# Altium PCB PCB_isdestymas.PcbDoc
Units mil, origin at the board's own origin, x right, y up, seen from the top; angles counter-clockwise.
Board outline 6000 x 4000 mil, 2 copper layers (Top Layer, Bottom Layer); 35 components, 32 nets, 205 pads, 0 vias.
Unrouted connection lines stored in the file: 90.
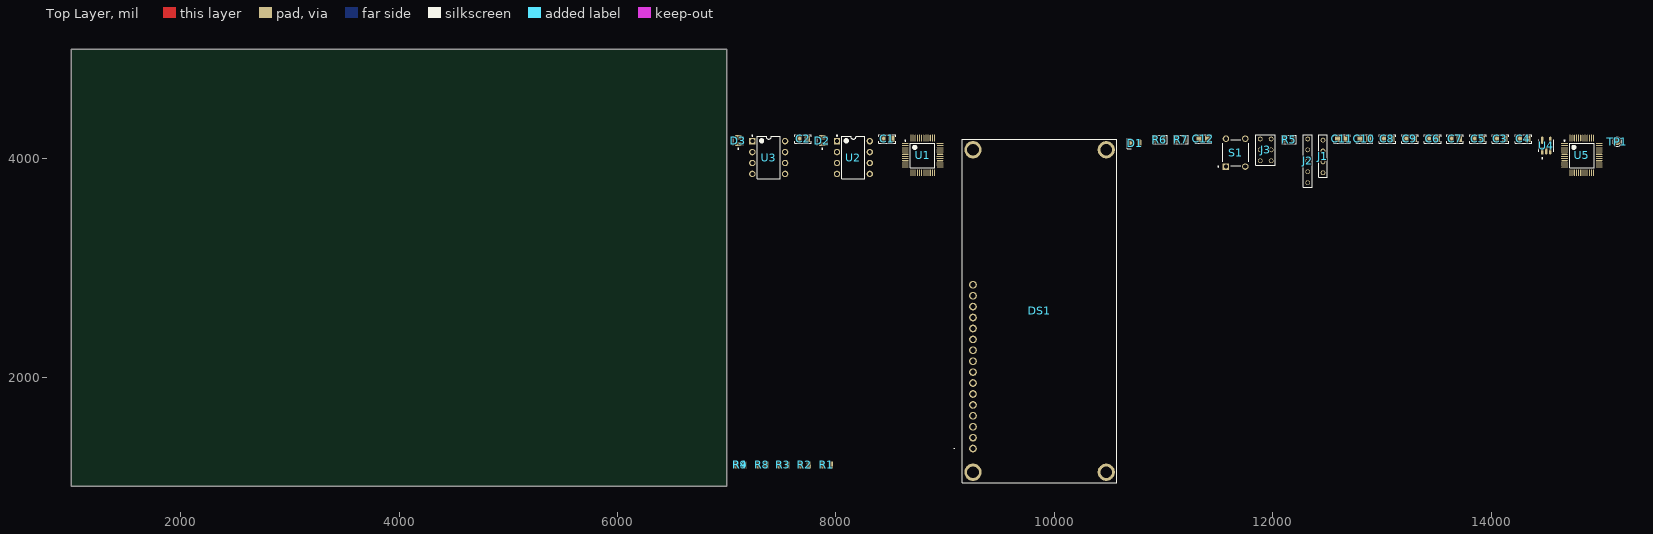
[diagram p0: Top Layer view]
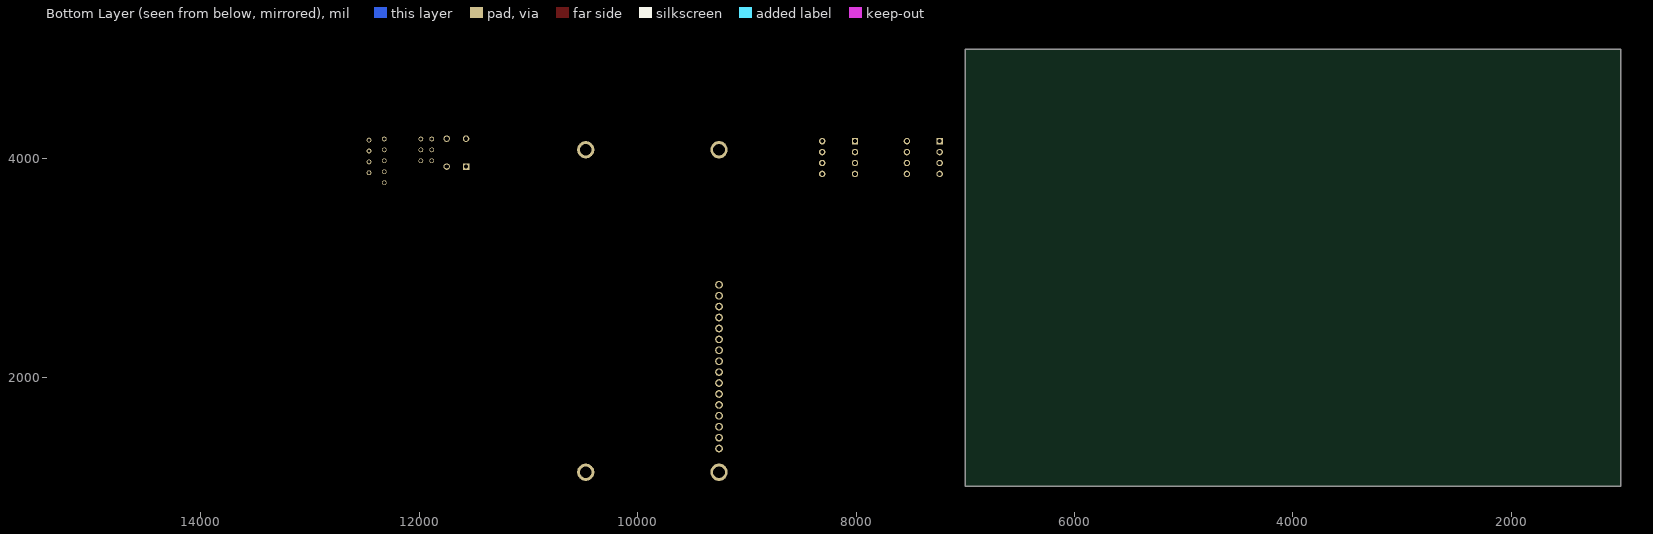
[diagram p1: Bottom Layer view, seen from below]

## Layer stack, top to bottom
Top Solder: solder mask 0.4, Solder Resist, Dk 3.5
Top Layer: signal copper 1.4
Dielectric 1: dielectric 12.6, FR-4, Dk 4.8
Bottom Layer: signal copper 1.4
Bottom Solder: solder mask 0.4, Solder Resist, Dk 3.5

## Board outline
1000,1000 7000,1000 7000,5000 1000,5000

## Design rules (kind name [scope] priority, off if disabled: settings)
Clearance [All] p1: gap=10 ignorepadtopadclearanceinfootprint=FALSE
PolygonConnect [All] p1: connectstyle=Relief reliefconductorwidth=10 reliefentries=4 polygonreliefangle="90 Angle" airgapwidth=10
RoutingVias [All] p1: holewidth=28 width=50 viastyle="Through Hole" minholewidth=28 minwidth=50 maxholewidth=28 maxwidth=50
SolderMaskExpansion [All] p1: expansion=4 istentingtop=FALSE
SupplyNets "Schematic Supply Nets_2" [InNet('CTRST')] p1: voltage=0.000
SupplyNets "Schematic Supply Nets_1" [InNet('3.3V')] p2: voltage=0.000
SupplyNets "Schematic Supply Nets" [InNet('5V_USB')] p3: voltage=0.000
Width [All] p1: maxlimit=10 minlimit=10 preferedwidth=10
30 further rules are at their usual default settings.

## Classes and differential pairs
net class D[0..7]: D0 D1 D2 D3 D4 D5 D6 D7

## Components (designator, comment, footprint, x,y, rotation, side; value= is the part's Value field where it differs from the comment)
C1 "560p" "CAP 0805_2012" 8470,4180 r0 top value=560pF
C2 "560p" "CAP 0805_2012" 7700,4180 r0 top value=560pF
C3 "1u" "CAP 0805_2012" 14085,4180 r0 top value=1uF
C4 "1u" "CAP 0805_2012" 14295,4180 r0 top value=1uF
C5 "100n" "CAP 0805_2012" 13880,4180 r0 top value=100nF
C6 "10u" "CAP 0805_2012" 13465,4180 r0 top value=10uF
C7 "100n" "CAP 0805_2012" 13670,4180 r0 top value=100nF
C8 "10u" "CAP 0805_2012" 13050,4180 r0 top value=10uF
C9 "100n" "CAP 0805_2012" 13255,4180 r0 top value=100nF
C10 "10u" "CAP 0805_2012" 12840,4180 r0 top value=10uF
C11 "100n" "CAP 0805_2012" 12635,4180 r0 top value=100nF
C12 "100n" "CAP 0805_2012" 11365,4180 r0 top value=100nF
D1 "GREEN" LED_0805_GREEN 10740,4140 r0 top
D2 "TEMD6200FX01" FP-6_541-5064_01-4-MFG 7875,4165 r90 top
D3 "TEMD6200FX01" FP-6_541-5064_01-4-MFG 7105,4165 r90 top
DS1 "162C-BA-BC" 162CBABC 9255,1345 r90 top
J1 "dupont header 4x1 2.54mm pitch" "DUPONT 4X1" 12460,3870 r90 top
J2 "dupont header 5x1 2.54mm pitch" "DUPONT 5X1" 12320,3780 r90 top
J3 "dupont header 3x2 2.54mm pitch" "DUPONT 3X2" 11885,3980 r90 top
R1 "820k" RES_0805#1 7915,1195 r0 top value=820kR
R2 "10k" RES_0805#1 7715,1195 r0 top value=10kR
R3 "330" RES_0805#1 7520,1195 r0 top value=330R
R4 "820k" RES_0805#1 7125,1195 r0 top value=820kR
R5 "1k" RES_0805#2 12150,4175 r0 top value=1kR
R6 "20k" RES_0805#2 10965,4175 r0 top value=20kR
R7 "20k" RES_0805#2 11160,4175 r0 top value=20kR
R8 "10k" RES_0805#1 7325,1195 r0 top value=10kR
R9 "330" RES_0805#1 7125,1195 r0 top value=330R
S1 "TS02-66-60-BK-260-LCR-D" "TACTILE_SWITCH 6X6X6MM" 11660,4055 r90 top
TP1 "3.3V" TP_OVAL 15155,4155 r0 top
U1 "STM32F103C8T6" STM-LQFP48_L 8795,4030 r0 top
U2 "MCP6002-E/P" PDIP300-P8 8160,4010 r0 top
U3 "MCP6002-E/P" PDIP300-P8 7385,4010 r0 top
U4 "AP2112K-3.3TRG1" FP-SOT25-IPC_A 14505,4120 r90 top
U5 "STM32F103C8T6" STM-LQFP48_L 14830,4030 r0 top

## Footprints (in the part's own frame and the unit in brackets; to place one, negate y for a bottom-side part, rotate by r counter-clockwise, add the part's x,y. Pads: shape width x height; smd on the part's side, far side on the other; paste and mask are expansions set on the pad)
162CBABC [mm]
  round 1.8 hole 1.2: 1(0,0) 2(2.54,0) 3(5.08,0) 4(7.62,0) 5(10.16,0) 6(12.7,0) 7(15.24,0) 8(17.78,0) 9(20.32,0) 10(22.86,0) 11(25.4,0) 12(27.94,0) 13(30.48,0) 14(33.02,0) 15(35.56,0) 16(38.1,0)
  round 4.05 hole 2.7: MH1(-5.5,0) MH2(-5.5,-31) MH3(69.5,-31) MH4(69.5,0)
  silkscreen extent -8,-33.5 72,4.4, body extent -7.96,-33.72 72.04,2.28, height 10.39
"CAP 0805_2012" [mm] "Chip Capacitor, 2-Leads, Body 2.00x1.20mm, IPC Medium Density"
  rect 1.3x1.4 smd: 1(-1,0) 2(1,0)
  silkscreen extent -1.92,-1.02 1.92,1.02, body extent -1,-0.64 1,0.64, height 1.26
"DUPONT 3X2" [mm] "Dupont_header 4x1 2.54mm pitch"
  round 1.1 hole 0.8: 1(0,0) 2(2.54,0) 3(5.08,0) 4(0,-2.54) 5(2.54,-2.54) 6(5.08,-2.54)
  silkscreen extent -1.02,-3.56 6.1,1.02
"DUPONT 4X1" [mm] "Dupont_header 4x1 2.54mm pitch"
  round 1.1 hole 0.8: 1(0,0) 2(2.54,0) 3(5.08,0) 4(7.62,0)
  silkscreen extent -1.02,-1.02 8.89,1.02
"DUPONT 5X1" [mm] "Dupont_header 5x1 2.54mm pitch"
  round 1.1 hole 0.8: 1(0,0) 2(2.54,0) 3(5.08,0) 4(7.62,0) 5(10.16,0)
  silkscreen extent -1.02,-1.02 11.18,1.02
FP-6_541-5064_01-4-MFG [mm]
  rect 1x1.45 smd paste+0 mask+0: 1(-0.8,0) 2(0.8,0)
  silkscreen extent -2,-1.16 1.05,1.17, body extent -1.4,-0.82 1.4,0.82, height 0.25
FP-SOT25-IPC_A [mm]
  rect 1.707x0.616 smd paste+0 mask+0: 1(-1.201,0.95)
  rrect100% 1.707x0.616 smd paste+0 mask+0: 2(-1.201,0) 3(-1.201,-0.95) 4(1.201,-0.95) 5(1.201,0.95)
  silkscreen extent -3.08,-1.75 1.4,1.75, body extent -2.55,-2 2.55,2, height 0.25
LED_0805_GREEN [mm]
  rrect25% 1x1.7 smd: A(0.95,0) K(-0.95,0)
  silkscreen extent -1.8,-1.2 -0.9,1.2, body extent -1,-0.63 1,0.63, height 1.12
PDIP300-P8 [mm] "8-Pin Plastic Dual In-Line Package (PDIP)"
  rect 1.5x1.5 hole 0.9: 1(-3.81,3.81)
  round 1.5 hole 0.9: 2(-3.81,1.27) 3(-3.81,-1.27) 4(-3.81,-3.81) 5(3.81,-3.81) 6(3.81,-1.27) 7(3.81,1.27) 8(3.81,3.81)
  silkscreen extent -3.93,-4.9 2.65,5.23, body extent -3.55,-4.9 3.55,4.9, height 4.32
RES_0805#1 [mm]
  rrect25% 1x1.7 smd: 1(-0.95,0) 2(0.95,0)
  body extent -1,-0.63 1,0.63, height 0.47
RES_0805#2 [mm]
  rect 0.7x1.3 smd: 1(-0.95,0) 2(0.95,0)
  silkscreen extent -1.68,-1.02 1.7,1.02, body extent -1,-0.61 1,0.64, height 0.6
STM-LQFP48_L [mm] "QFP, 48-Leads, Body 7x7mm, Pitch 0.5mm, IPC High Density"
  oval 1.55x0.25 smd: 1(-4.025,2.75) 2(-4.025,2.25) 3(-4.025,1.75) 4(-4.025,1.25) 5(-4.025,0.75) 6(-4.025,0.25) 7(-4.025,-0.25) 8(-4.025,-0.75) 9(-4.025,-1.25) 10(-4.025,-1.75) 11(-4.025,-2.25) 12(-4.025,-2.75) 25(4.025,-2.75) 26(4.025,-2.25) 27(4.025,-1.75) 28(4.025,-1.25) 29(4.025,-0.75) 30(4.025,-0.25) 31(4.025,0.25) 32(4.025,0.75) 33(4.025,1.25) 34(4.025,1.75) 35(4.025,2.25) 36(4.025,2.75)
  oval 0.25x1.55 smd: 13(-2.75,-4.025) 14(-2.25,-4.025) 15(-1.75,-4.025) 16(-1.25,-4.025) 17(-0.75,-4.025) 18(-0.25,-4.025) 19(0.25,-4.025) 20(0.75,-4.025) 21(1.25,-4.025) 22(1.75,-4.025) 23(2.25,-4.025) 24(2.75,-4.025) 37(2.75,4.025) 38(2.25,4.025) 39(1.75,4.025) 40(1.25,4.025) 41(0.75,4.025) 42(0.25,4.025) 43(-0.25,4.025) 44(-0.75,4.025) 45(-1.25,4.025) 46(-1.75,4.025) 47(-2.25,4.025) 48(-2.75,4.025)
  silkscreen extent -4.15,-2.85 2.85,3.55, body extent -3.5,-3.5 3.5,3.5, height 1.6
"TACTILE_SWITCH 6X6X6MM" [mm]
  rect 1.508x1.508 hole 1: 1(-3.25,2.25)
  round 1.508 hole 1: 1(3.25,2.25) 2(-3.25,-2.25) 2(3.25,-2.25)
  silkscreen extent -3.35,-3 3,4.1, body extent -3.95,-3 3.95,3, height 6
TP_OVAL [mil]
  round 60 smd: 1(0,0)
  silkscreen extent -42,-42 42,42

## Part data
C1: library part Capacitor, "Ceramic Capacitor, Multilayer, Ceramic, 50V, 5% +Tol, 5% -Tol, C0G, -/+30ppm/Cel TC, 0.00056uF, Surface Mount, 0805", Capacitor Type=Ceramic, Case/Package=0603, Manufacturer=KEMET, Manufacturer Part Number=C0603C561J5GACTU, Manufacturer Series=C0805C561J5GACTU, Max Operating Temperature=125°C, Min Operating Temperature=-55°C, Package Shape=Rectangular, Package Style=SMTMeter, Supplier Part Number=80-C0603C561J5G, Temperature Characteristics Code=C0G, Tolerance  (fill in as +-)=5%, Category="Ceramic Capacitors", ComponentLink1Description=https://datasheet.ciiva.com:443/pdfs/VipMasterIC/IC/KEME/KEME-S-A0005605168/KEME-S-A0005605168-1.pdf?src-supplier=IHS+Markit, ComponentLink1URL=https://datasheet.ciiva.com:443/pdfs/VipMasterIC/IC/KEME/KEME-S-A0005605168/KEME-S-A0005605168-1.pdf?src-supplier=IHS+Markit, ComponentLink2Description=https://datasheet.ciiva.com:443/pdfs/VipMasterIC/IC/KEME/KEME-S-A0007731554/KEME-S-A0007733310-1.pdf?src-supplier=IHS+Markit, ComponentLink2URL=https://datasheet.ciiva.com:443/pdfs/VipMasterIC/IC/KEME/KEME-S-A0007731554/KEME-S-A0007733310-1.pdf?src-supplier=IHS+Markit, ComponentLink3Description=https://datasheet.ciiva.com/7842/1372242-7842621.pdf?src-supplier=Element14, ComponentLink3URL=https://datasheet.ciiva.com/7842/1372242-7842621.pdf?src-supplier=Element14, ComponentLink4Description=https://datasheet.ciiva.com/14599/70095383-14599884.pdf?src-supplier=Allied+Electronics, ComponentLink4URL=https://datasheet.ciiva.com/14599/70095383-14599884.pdf?src-supplier=Allied+Electronics, Dielectric Material=Ceramic, Height=0.8mm, JESD-609 Code=e3, Length=1.6mm, Mounting Technology="Surface Mount", Multilayer=Yes, Packaging="Tape and Reel", Pins=2, Pricing="1=0.1, 10=0.045, 50=0.045, 100=0.029, 1000=0.021, 10000=0.012 (USD)", Reach SVHC Compliant=Yes, RoHS=Yes, RoHS Compliant=Yes, Stock=40752, Supplier=Mouser, Terminal Finish=Nickel, Termination=Wraparound, Tolerance (fill in as +-)=5%, Width=0.8mm
C2: library part Capacitor, "Ceramic Capacitor, Multilayer, Ceramic, 50V, 5% +Tol, 5% -Tol, C0G, -/+30ppm/Cel TC, 0.00056uF, Surface Mount, 0805", Capacitor Type=Ceramic, Case/Package=0805, Manufacturer=KEMET, Manufacturer Part Number=C0805C561J5GACTU, Max Operating Temperature=125°C, Min Operating Temperature=-55°C, Package Shape=Rectangular, Supplier Part Number=80-C0805C561J5G, Temperature Characteristics Code=C0G, Tolerance  (fill in as +-)=5%, Category="Ceramic Capacitors", ComponentLink1Description=https://datasheet.ciiva.com:443/pdfs/VipMasterIC/IC/KEME/KEME-S-A0007731554/KEME-S-A0007733310-1.pdf?src-supplier=IHS+Markit, ComponentLink1URL=https://datasheet.ciiva.com:443/pdfs/VipMasterIC/IC/KEME/KEME-S-A0007731554/KEME-S-A0007733310-1.pdf?src-supplier=IHS+Markit, ComponentLink2Description=https://datasheet.ciiva.com/7842/1372242-7842621.pdf?src-supplier=Element14, ComponentLink2URL=https://datasheet.ciiva.com/7842/1372242-7842621.pdf?src-supplier=Element14, ComponentLink3Description=https://datasheet.ciiva.com/14599/70095383-14599884.pdf?src-supplier=Allied+Electronics, ComponentLink3URL=https://datasheet.ciiva.com/14599/70095383-14599884.pdf?src-supplier=Allied+Electronics, Dielectric Material=Ceramic, JESD-609 Code=e3, Manufacturer Series=C0805C561J5GACTU, Mounting Technology="Surface Mount", Multilayer=Yes, Packaging="Tape and Reel", Pins=2, Pricing="1=0.12, 10=0.072, 50=0.072, 100=0.047, 1000=0.032, 10000=0.02 (USD)", Reach SVHC Compliant=Yes, RoHS=Yes, RoHS Compliant=Yes, Stock=12009, Supplier=Mouser, Terminal Finish=Nickel, Termination=Wraparound, Tolerance (fill in as +-)=5%
C3 C4: library part Capacitor, "Ceramic Capacitor, Multilayer, Ceramic, 10V, 10% +Tol, 10% -Tol, X7R, 15% TC, 1uF, Surface Mount, 0805", Capacitor Type=Ceramic, Case/Package=0805, Manufacturer=Yageo, Manufacturer Part Number=CC0805KKX7R6BB105, Max Operating Temperature=125°C, Min Operating Temperature=-55°C, Package Shape=Rectangular, Package Style=SMTMeter, Supplier Part Number=68R4879, Temperature Characteristics Code=X7R, Tolerance  (fill in as +-)=10%, Category="Ceramic Capacitors", ComponentLink1Description=https://datasheet.ciiva.com:443/pdfs/VipMasterIC/IC/YAGO/YAGO-S-A0003557223/YAGO-S-A0003557223-1.pdf?src-supplier=IHS+Markit, ComponentLink1URL=https://datasheet.ciiva.com:443/pdfs/VipMasterIC/IC/YAGO/YAGO-S-A0003557223/YAGO-S-A0003557223-1.pdf?src-supplier=IHS+Markit, Dielectric Material=Ceramic, Height=1.25mm, JESD-609 Code=e3, Length=2mm, Mounting Technology="Surface Mount", Multilayer=Yes, Packaging="Tape and Reel", Pins=2, Pricing="1=0.079 (USD)", Reach SVHC Compliant=Yes, RoHS=Yes, RoHS Compliant=Yes, Stock=1232, Supplier=Avnet, Terminal Finish=Nickel, Termination=Wraparound, Tolerance (fill in as +-)=10%, Width=1.25mm
C5 C7 C9 C11 C12: library part Capacitor, "Ceramic Capacitor, Multilayer, Ceramic, 50V, 10% +Tol, 10% -Tol, X7R, 15% TC, 0.1uF, Surface Mount, 0805", Capacitor Type=Ceramic, Case/Package=0402, Manufacturer=KEMET, Manufacturer Part Number=C0402C104K8PACTU, Max Operating Temperature=85°C, Min Operating Temperature=-55°C, Package Shape=Rectangular, Package Style=SMTMeter, Supplier Part Number=80-C0402C104K8P, Temperature Characteristics Code=X5R, Tolerance  (fill in as +-)=10%, Category="Ceramic Capacitors", ComponentLink1Description=https://datasheet.ciiva.com:443/pdfs/VipMasterIC/IC/KEME/KEME-S-A0008991665/KEME-S-A0008991665-1.pdf?src-supplier=IHS+Markit, ComponentLink1URL=https://datasheet.ciiva.com:443/pdfs/VipMasterIC/IC/KEME/KEME-S-A0008991665/KEME-S-A0008991665-1.pdf?src-supplier=IHS+Markit, ComponentLink2Description=https://datasheet.ciiva.com/144/docfinderpartnumber-c0402c104k8pactu-144097.pdf?src-supplier=Digikey, ComponentLink2URL=https://datasheet.ciiva.com/144/docfinderpartnumber-c0402c104k8pactu-144097.pdf?src-supplier=Digikey, ComponentLink3Description=https://datasheet.ciiva.com/7747/1776086-7747440.pdf?src-supplier=Element14, ComponentLink3URL=https://datasheet.ciiva.com/7747/1776086-7747440.pdf?src-supplier=Element14, ComponentLink4Description=https://datasheet.ciiva.com/28645/1789732-28645387.pdf?src-supplier=Element14, ComponentLink4URL=https://datasheet.ciiva.com/28645/1789732-28645387.pdf?src-supplier=Element14, ComponentLink5Description=https://datasheet.ciiva.com/14588/70095383-14588187.pdf?src-supplier=Allied+Electronics, ComponentLink5URL=https://datasheet.ciiva.com/14588/70095383-14588187.pdf?src-supplier=Allied+Electronics, ComponentLink6Description=https://datasheet.ciiva.com/14595/70095383-14595064.pdf?src-supplier=Allied+Electronics, ComponentLink6URL=https://datasheet.ciiva.com/14595/70095383-14595064.pdf?src-supplier=Allied+Electronics, ComponentLink7Description=https://datasheet.ciiva.com:443/pdfs/VipMasterIC/IC/YAGO/YAGO-S-A0003557223/YAGO-S-A0003557223-1.pdf?src-supplier=IHS+Markit, ComponentLink7URL=https://datasheet.ciiva.com:443/pdfs/VipMasterIC/IC/YAGO/YAGO-S-A0003557223/YAGO-S-A0003557223-1.pdf?src-supplier=IHS+Markit, ComponentLink8Description=https://datasheet.ciiva.com/11786/0900766b80d84f1d-11786009.pdf?src-supplier=Rs, ComponentLink8URL=https://datasheet.ciiva.com/11786/0900766b80d84f1d-11786009.pdf?src-supplier=Rs, ComponentLink9Description=https://datasheet.ciiva.com/11464/upy-gphc-x7r-6-3v-to-50v-8-11464757.pdf?src-supplier=Avnet, ComponentLink9URL=https://datasheet.ciiva.com/11464/upy-gphc-x7r-6-3v-to-50v-8-11464757.pdf?src-supplier=Avnet, ComponentLink10Description=https://datasheet.ciiva.com/155/mlccorderingcode-155930.pdf?src-supplier=Digikey, ComponentLink10URL=https://datasheet.ciiva.com/155/mlccorderingcode-155930.pdf?src-supplier=Digikey, ComponentLink11Description=https://datasheet.ciiva.com/28450/1489800-28450805.pdf?src-supplier=Element14, ComponentLink11URL=https://datasheet.ciiva.com/28450/1489800-28450805.pdf?src-supplier=Element14, ComponentLink12Description=https://datasheet.ciiva.com/46393/1734573-46393307.pdf?src-supplier=Element14, ComponentLink12URL=https://datasheet.ciiva.com/46393/1734573-46393307.pdf?src-supplier=Element14, ComponentLink13Description=https://datasheet.ciiva.com/155/mlccorderingcode-155929.pdf?src-supplier=Digikey, ComponentLink13URL=https://datasheet.ciiva.com/155/mlccorderingcode-155929.pdf?src-supplier=Digikey, ComponentLink14Description=https://datasheet.ciiva.com/155/mlccorderingcode-155931.pdf?src-supplier=Digikey, ComponentLink14URL=https://datasheet.ciiva.com/155/mlccorderingcode-155931.pdf?src-supplier=Digikey, ComponentLink15Description=https://datasheet.ciiva.com/29242/445210-da-01-en-kerko-chip-0805-x7r-0-1uf-10proz-50vg-29242074.pdf?src-supplier=Conrad, ComponentLink15URL=https://datasheet.ciiva.com/29242/445210-da-01-en-kerko-chip-0805-x7r-0-1uf-10proz-50vg-29242074.pdf?src-supplier=Conrad, Dielectric Material=Ceramic, Height=0.5mm, JESD-609 Code=e3, Length=1mm, Mounting Technology="Surface Mount", Multilayer=Yes, Packaging="Tape and Reel", Pins=2, Pricing="1=0.1, 10=0.025, 50=0.025, 100=0.015, 1000=0.011, 10000=0.005 (USD)", Reach SVHC Compliant=Yes, RoHS=Yes, RoHS Compliant=Yes, Stock=545712, Supplier=Mouser, Terminal Finish=Nickel, Termination=Wraparound, Tolerance (fill in as +-)=10%, Width=0.5mm
C6 C8 C10: library part Capacitor, "Ceramic Capacitor, Multilayer, Ceramic, 25V, 10% +Tol, 10% -Tol, X5R, 15% TC, 10uF, Surface Mount, 0805", Capacitor Type=Ceramic, Case/Package=0805, Manufacturer=Murata, Manufacturer Part Number=GRM21BR61E106KA73L, Max Operating Temperature=85°C, Min Operating Temperature=-55°C, Package Shape=Rectangular, Package Style=SMTMeter, Supplier Part Number=81-GRM21BR61E106KA3L, Temperature Characteristics Code=X5R, Tolerance  (fill in as +-)=10%, Category="Ceramic Capacitors", ComponentLink1Description=https://datasheet.ciiva.com:443/pdfs/VipMasterIC/IC/MURE/MURE-S-A0008911298/MURE-S-A0008911412-1.pdf?src-supplier=IHS+Markit, ComponentLink1URL=https://datasheet.ciiva.com:443/pdfs/VipMasterIC/IC/MURE/MURE-S-A0008911298/MURE-S-A0008911412-1.pdf?src-supplier=IHS+Markit, Dielectric Material=Ceramic, Height=1.25mm, JESD-609 Code=e3, Length=2mm, Mounting Technology="Surface Mount", Multilayer=Yes, Packaging="Tape and Reel", Pins=2, Pricing="1=0.15, 10=0.044, 50=0.044, 100=0.041, 1000=0.041, 10000=0.03 (USD)", Reach SVHC Compliant=Yes, RoHS=Yes, RoHS Compliant=Yes, Stock=273323, Supplier=Mouser, Terminal Finish=Nickel, Termination=Wraparound, Tolerance (fill in as +-)=10%, Width=1.25mm
D1: library part LED_0805_GREEN, "Single Color LED, Green, Water Clear, 1.4mm", Color=Green, Forward Current=30mA, Max Operating Temperature=85°C, Min Operating Temperature=-40°C, Supplier Part Number=710-150080GS75000, Category=LEDs, Channels=1, ComponentLink1Description=https://datasheet.ciiva.com:443/pdfs/VipMasterIC/IC/MIDC/MIDC-S-A0007455966/MIDC-S-A0007455966-1.pdf?src-supplier=IHS+Markit, ComponentLink1URL=https://datasheet.ciiva.com:443/pdfs/VipMasterIC/IC/MIDC/MIDC-S-A0007455966/MIDC-S-A0007455966-1.pdf?src-supplier=IHS+Markit, ComponentLink2Description=https://datasheet.ciiva.com/29563/150080gs75000-29563008.pdf?src-supplier=Digikey, ComponentLink2URL=https://datasheet.ciiva.com/29563/150080gs75000-29563008.pdf?src-supplier=Digikey, ComponentLink3Description=https://datasheet.ciiva.com/29279/759434-da-01-en-chipled-0805-w-kl-gruen-150080gs75000-29279039.pdf?src-supplier=Conrad, ComponentLink3URL=https://datasheet.ciiva.com/29279/759434-da-01-en-chipled-0805-w-kl-gruen-150080gs75000-29279039.pdf?src-supplier=Conrad, Lens Style="WATER CLEAR", Luminous Intensity-Nom=450mcd, Mounting Technology="Surface Mount", Optoelectronic Device Type="SINGLE COLOR LED", Overall Height=0.7mm, Packaging="Tape and Reel", Pins=2, Pricing="1=0.19, 10=0.187, 50=0.176, 100=0.151, 1000=0.138, 10000=0.138 (USD)", Reach SVHC Compliant=Yes, RoHS=Yes, RoHS Compliant=Yes, Shape=Rectangular, Size=1.4mm, Stock=72768, Supplier=Mouser, Terminal Pitch=2.1mm, Viewing Angle=140°
D2 D3: library part CMP-02531-000004-1, "SENSOR PHOTODIODE 540NM 0805", Ambient Temperature Range High=+100°C, Ambient Temperature Range Low=-40°C, Dark Current=0.0001uA, Manufacturer=Vishay, Package=6.541-5064.01-4, Power Dissipation=100mW, Reverse Breakdown Voltage=16V, Temperature="-40°C to +100°C", Automotive=Yes, Automotive Grade="Grade 3", Category=Diode, ComponentLink2Description=Datasheet, ComponentLink2URL=http://www.vishay.com/docs/81812/temd6200.pdf, Device Class L1=Sensors, Device Class L2="Optical Sensors", Device Class L3=Photodiodes, Digikey Description="SENSOR PHOTODIODE 540NM 0805", Height=0.95mm, Lead Free=Yes, Manufacturer Part Number=TEMD6200FX01, Max Junction Temp=+100°C, Mouser Description="Ambient Light Sensors 16V 100mW 60Deg AEC-Q101 Qualified", Octopart=https://octopart.com/temd6200fx01-vishay-19158932, RoHS=TRUE, Sensor Output=Photodiode, Temperature Range High=+100°C, Temperature Range Low=-40°C, Viewing Angle=120°
DS1: "Display", Manufacturer_Name=Displaytech, Datasheet Link=http://uk.rs-online.com/web/p/products/1775379, Height=5mm, Manufacturer_Part_Number=162C-BA-BC
J1: library part "Dupont header 4x1"
J2: library part "Dupont header 5x1_1"
J3: library part "Dupont header 3x2"
R1 R4: library part Resistor, "Fixed Resistor, Metal Glaze/thick Film, 0.125W, 820000ohm, 150V, 1% +/-Tol, 100ppm/Cel, Surface Mount, 0805", Case/Package=0805, Manufacturer=Vishay, Manufacturer Part Number=CRCW0805820KFKEA, Max Operating Temperature=155°C, Min Operating Temperature=-55°C, Package Height=0.45mm, Package Length=2mm, Package Shape=Rectangular, Package Width=1.25mm, Power=125mW, Rated Temperature=70°C, Resistor Type="FIXED RESISTOR", Supplier Part Number=71-CRCW0805820KFKEA, Temperature Coefficient (ppm/Cel)=100, Tolerance=1%, Working Voltage=150V, Category="Chip SMD Resistors", ComponentLink1Description=https://datasheet.ciiva.com:443/pdfs/VipMasterIC/IC/VISH/VISH-S-A0007266705/VISH-S-A0007266705-1.pdf?src-supplier=IHS+Markit, ComponentLink1URL=https://datasheet.ciiva.com:443/pdfs/VipMasterIC/IC/VISH/VISH-S-A0007266705/VISH-S-A0007266705-1.pdf?src-supplier=IHS+Markit, ComponentLink2Description=https://datasheet.ciiva.com/11811/0900766b80d98b26-11811079.pdf?src-supplier=Rs, ComponentLink2URL=https://datasheet.ciiva.com/11811/0900766b80d98b26-11811079.pdf?src-supplier=Rs, ComponentLink3Description=https://datasheet.ciiva.com/2495/dcrcwe3-2495929.pdf?src-supplier=Digikey, ComponentLink3URL=https://datasheet.ciiva.com/2495/dcrcwe3-2495929.pdf?src-supplier=Digikey, ComponentLink4Description=https://datasheet.ciiva.com/2495/dcrcwe3-2495930.pdf?src-supplier=Digikey, ComponentLink4URL=https://datasheet.ciiva.com/2495/dcrcwe3-2495930.pdf?src-supplier=Digikey, ComponentLink5Description=https://datasheet.ciiva.com/2495/dcrcwe3-2495931.pdf?src-supplier=Digikey, ComponentLink5URL=https://datasheet.ciiva.com/2495/dcrcwe3-2495931.pdf?src-supplier=Digikey, ComponentLink6Description=https://datasheet.ciiva.com/5546/dcrcwe3-109170-5546905.pdf?src-supplier=Mouser, ComponentLink6URL=https://datasheet.ciiva.com/5546/dcrcwe3-109170-5546905.pdf?src-supplier=Mouser, ComponentLink7Description=https://datasheet.ciiva.com/7670/1697337-7670939.pdf?src-supplier=Element14, ComponentLink7URL=https://datasheet.ciiva.com/7670/1697337-7670939.pdf?src-supplier=Element14, ComponentLink8Description=https://datasheet.ciiva.com/7670/1697337-7670940.pdf?src-supplier=Element14, ComponentLink8URL=https://datasheet.ciiva.com/7670/1697337-7670940.pdf?src-supplier=Element14, ComponentLink9Description=https://datasheet.ciiva.com/22706/1697337-22706282.pdf?src-supplier=Element14, ComponentLink9URL=https://datasheet.ciiva.com/22706/1697337-22706282.pdf?src-supplier=Element14, Construction=Chip, JESD-609 Code=e3, Mounting Technology="Surface Mount", Packaging="Tape and Reel", Pins=2, Pricing="1=0.1, 10=0.025, 50=0.025, 100=0.021, 1000=0.013, 10000=0.007 (USD)", Reach SVHC Compliant=Yes, Reference Standard=AEC-Q200, RoHS=Yes, RoHS Compliant=Yes, Stock=12041, Supplier=Mouser, Technology="METAL GLAZE/THICK FILM", Terminal Finish=Nickel, Termination=Wraparound
R2 R8: library part Resistor, "Fixed Resistor, Metal Glaze/thick Film, 0.125W, 10000ohm, 150V, 1% +/-Tol, 100ppm/Cel, Surface Mount, 0805", Case/Package=0805, Manufacturer="Vishay Beyschlag", Manufacturer Part Number=MBB02070C1002FCT00, Max Operating Temperature=125°C, Min Operating Temperature=-55°C, Package Height=0.45mm, Package Length=6.5mm, Package Shape=Rectangular, Package Style=AXIAL, Package Width=1.25mm, Power=400mW, Rated Temperature=70°C, Resistor Type="FIXED RESISTOR", Supplier Part Number=594-MBB02070C1002FCT, Temperature Coefficient (ppm/Cel)=50, Tolerance=1%, Working Voltage=350V, Additional Feature="RATED AC VOLTAGE: 350V", Category="Through-Hole Resistors", ComponentLink1Description=https://datasheet.ciiva.com:443/pdfs/VipMasterIC/IC/VISH/VISH-S-A0005972005/VISH-S-A0005972005-1.pdf?src-supplier=IHS+Markit, ComponentLink1URL=https://datasheet.ciiva.com:443/pdfs/VipMasterIC/IC/VISH/VISH-S-A0005972005/VISH-S-A0005972005-1.pdf?src-supplier=IHS+Markit, ComponentLink2Description=https://datasheet.ciiva.com/11823/0900766b803d0387-11823234.pdf?src-supplier=Rs, ComponentLink2URL=https://datasheet.ciiva.com/11823/0900766b803d0387-11823234.pdf?src-supplier=Rs, ComponentLink3Description=https://datasheet.ciiva.com/7861/b0207c-f-7861404.pdf?src-supplier=Element14, ComponentLink3URL=https://datasheet.ciiva.com/7861/b0207c-f-7861404.pdf?src-supplier=Element14, ComponentLink4Description=https://datasheet.ciiva.com:443/pdfs/VipMasterIC/IC/VISH/VISH-S-A0007266705/VISH-S-A0007266705-1.pdf?src-supplier=IHS+Markit, ComponentLink4URL=https://datasheet.ciiva.com:443/pdfs/VipMasterIC/IC/VISH/VISH-S-A0007266705/VISH-S-A0007266705-1.pdf?src-supplier=IHS+Markit, ComponentLink5Description=https://datasheet.ciiva.com/11808/0900766b80d98b26-11808216.pdf?src-supplier=Rs, ComponentLink5URL=https://datasheet.ciiva.com/11808/0900766b80d98b26-11808216.pdf?src-supplier=Rs, ComponentLink6Description=https://datasheet.ciiva.com/46394/1720486-46394381.pdf?src-supplier=Element14, ComponentLink6URL=https://datasheet.ciiva.com/46394/1720486-46394381.pdf?src-supplier=Element14, ComponentLink7Description=https://datasheet.ciiva.com/16719/70201119-16719082.pdf?src-supplier=Allied+Electronics, ComponentLink7URL=https://datasheet.ciiva.com/16719/70201119-16719082.pdf?src-supplier=Allied+Electronics, ComponentLink8Description=https://datasheet.ciiva.com/16755/70201119-16755389.pdf?src-supplier=Allied+Electronics, ComponentLink8URL=https://datasheet.ciiva.com/16755/70201119-16755389.pdf?src-supplier=Allied+Electronics, ComponentLink9Description=https://datasheet.ciiva.com/5547/dcrcwe3-109170-5547559.pdf?src-supplier=Mouser, ComponentLink9URL=https://datasheet.ciiva.com/5547/dcrcwe3-109170-5547559.pdf?src-supplier=Mouser, ComponentLink10Description=https://datasheet.ciiva.com/8337/dcrcwe3-8337774.pdf?src-supplier=Avnet, ComponentLink10URL=https://datasheet.ciiva.com/8337/dcrcwe3-8337774.pdf?src-supplier=Avnet, Construction=Tubular, JESD-609 Code=e3, Lead Diameter=0.6mm, Lead Length=28mm, Mounting Technology="Through Hole", Packaging="Ammo Pack", Pins=2, Pricing="1=0.1, 10=0.078, 50=0.069, 100=0.065, 1000=0.055, 10000=0.037 (USD)", Reach SVHC Compliant=Yes, Reference Standard=AEC-Q200, RoHS=Yes, RoHS Compliant=Yes, Stock=25852, Supplier=Mouser, Technology="THIN FILM", Terminal Finish=Nickel, Termination=Wire
R3 R9: library part Resistor, "Fixed Resistor, Metal Glaze/thick Film, 0.125W, 330ohm, 150V, 1% +/-Tol, 100ppm/Cel, Surface Mount, 0805", Case/Package=0805, Manufacturer="TE Connectivity", Manufacturer Part Number=CFR50J330R, Manufacturer Series=CFR, Max Operating Temperature=155°C, Min Operating Temperature=-55°C, Package Height=0.45mm, Package Length=9mm, Package Shape=Tubular, Package Style=AXIAL, Package Width=1.25mm, Power=500mW, Rated Temperature=70°C, Resistor Type="FIXED RESISTOR", Supplier Part Number=279-CFR50J330R, Temperature Coefficient (ppm/Cel)=450, Tolerance=5%, Working Voltage=350V, Category="Through-Hole Resistors", ComponentLink1Description=https://datasheet.ciiva.com:443/pdfs/VipMasterIC/IC/TYEL/TYEL-S-A0009531935/TYEL-S-A0009536771-1.pdf?src-supplier=IHS+Markit, ComponentLink1URL=https://datasheet.ciiva.com:443/pdfs/VipMasterIC/IC/TYEL/TYEL-S-A0009531935/TYEL-S-A0009536771-1.pdf?src-supplier=IHS+Markit, ComponentLink2Description=https://datasheet.ciiva.com/11823/0900766b80098b49-11823751.pdf?src-supplier=Rs, ComponentLink2URL=https://datasheet.ciiva.com/11823/0900766b80098b49-11823751.pdf?src-supplier=Rs, ComponentLink3Description=https://datasheet.ciiva.com/30211/eng-ds-1773195-d-30211324.pdf?src-supplier=Onlinecomponents.com, ComponentLink3URL=https://datasheet.ciiva.com/30211/eng-ds-1773195-d-30211324.pdf?src-supplier=Onlinecomponents.com, ComponentLink4Description=https://datasheet.ciiva.com/16781/70063023-16781994.pdf?src-supplier=Allied+Electronics, ComponentLink4URL=https://datasheet.ciiva.com/16781/70063023-16781994.pdf?src-supplier=Allied+Electronics, ComponentLink5Description=https://datasheet.ciiva.com:443/pdfs/VipMasterIC/IC/VISH/VISH-S-A0007266705/VISH-S-A0007266705-1.pdf?src-supplier=IHS+Markit, ComponentLink5URL=https://datasheet.ciiva.com:443/pdfs/VipMasterIC/IC/VISH/VISH-S-A0007266705/VISH-S-A0007266705-1.pdf?src-supplier=IHS+Markit, ComponentLink6Description=https://datasheet.ciiva.com/2495/dcrcwe3-2495803.pdf?src-supplier=Digikey, ComponentLink6URL=https://datasheet.ciiva.com/2495/dcrcwe3-2495803.pdf?src-supplier=Digikey, ComponentLink7Description=https://datasheet.ciiva.com/16769/70201119-16769852.pdf?src-supplier=Allied+Electronics, ComponentLink7URL=https://datasheet.ciiva.com/16769/70201119-16769852.pdf?src-supplier=Allied+Electronics, ComponentLink8Description=https://datasheet.ciiva.com/5545/dcrcwe3-109170-5545357.pdf?src-supplier=Mouser, ComponentLink8URL=https://datasheet.ciiva.com/5545/dcrcwe3-109170-5545357.pdf?src-supplier=Mouser, ComponentLink9Description=https://datasheet.ciiva.com/8944/dcrcwe3-8944773.pdf?src-supplier=Avnet, ComponentLink9URL=https://datasheet.ciiva.com/8944/dcrcwe3-8944773.pdf?src-supplier=Avnet, ComponentLink10Description=https://datasheet.ciiva.com/7777/1697337-7777390.pdf?src-supplier=Element14, ComponentLink10URL=https://datasheet.ciiva.com/7777/1697337-7777390.pdf?src-supplier=Element14, ComponentLink11Description=https://datasheet.ciiva.com/2495/dcrcwe3-2495804.pdf?src-supplier=Digikey, ComponentLink11URL=https://datasheet.ciiva.com/2495/dcrcwe3-2495804.pdf?src-supplier=Digikey, ComponentLink12Description=https://datasheet.ciiva.com/2495/dcrcwe3-2495805.pdf?src-supplier=Digikey, ComponentLink12URL=https://datasheet.ciiva.com/2495/dcrcwe3-2495805.pdf?src-supplier=Digikey, ComponentLink13Description=https://datasheet.ciiva.com/8944/dcrcwe3-8944776.pdf?src-supplier=Avnet, ComponentLink13URL=https://datasheet.ciiva.com/8944/dcrcwe3-8944776.pdf?src-supplier=Avnet, ComponentLink14Description=https://datasheet.ciiva.com/7777/1720486-7777573.pdf?src-supplier=Element14, ComponentLink14URL=https://datasheet.ciiva.com/7777/1720486-7777573.pdf?src-supplier=Element14, Construction=Cylindrical, JESD-609 Code=e3, Lead Diameter=0.54mm, Mounting Technology="Through Hole", Packaging="Ammo Pack", Pins=2, Pricing="1=0.1, 10=0.065, 50=0.048, 100=0.043, 1000=0.029, 10000=0.017 (USD)", Reach SVHC Compliant=Yes, Reference Standard=AEC-Q200, RoHS=Yes, RoHS Compliant=Yes, Series=CFR, Stock=7931, Supplier=Mouser, Technology="CARBON FILM", Terminal Finish=Tin, Termination=Wire
R5: library part Resistor, "Fixed Resistor, Metal Glaze/thick Film, 0.125W, 1000ohm, 150V, 1% +/-Tol, 100ppm/Cel, Surface Mount, 0805", Case/Package=0805, Manufacturer=Yageo, Manufacturer Part Number=RC0805FR-071KL, Max Operating Temperature=155°C, Min Operating Temperature=-55°C, Package Height=0.5mm, Package Length=2mm, Package Shape=Rectangular, Package Width=1.25mm, Power=125mW, Rated Temperature=70°C, Resistor Type="FIXED RESISTOR", Supplier Part Number=8126013, Temperature Coefficient (ppm/Cel)=100, Tolerance=1%, Working Voltage=150V, Additional Feature="LASER TRIMMABLE", Category="Chip SMD Resistors", ComponentLink1Description=https://datasheet.ciiva.com:443/pdfs/VipMasterIC/IC/YAGO/YAGO-S-A0008145938/YAGO-S-A0008145938-1.pdf?src-supplier=IHS+Markit, ComponentLink1URL=https://datasheet.ciiva.com:443/pdfs/VipMasterIC/IC/YAGO/YAGO-S-A0008145938/YAGO-S-A0008145938-1.pdf?src-supplier=IHS+Markit, Construction=Chip, JESD-609 Code=e3, Mounting Technology="Surface Mount", Packaging="Tape and Reel", Pins=2, Pricing="5000=0.0017, 25000=0.0016, 125000=0.0015, 375000=0.0015, 1000000=0.0014 (USD)", Reach SVHC Compliant=Yes, RoHS=Yes, RoHS Compliant=Yes, Stock=3880000, Supplier="Future Electronics", Technology="METAL GLAZE/THICK FILM", Terminal Finish=Nickel, Termination=Wraparound
R6 R7: library part Resistor, "Fixed Resistor, Metal Glaze/thick Film, 0.125W, 20000ohm, 150V, 1% +/-Tol, 100ppm/Cel, Surface Mount, 0805", Case/Package=0805, Manufacturer=Vishay, Manufacturer Part Number=CRCW080520K0FKEA, Max Operating Temperature=155°C, Min Operating Temperature=-55°C, Package Height=0.45mm, Package Length=2mm, Package Shape=Rectangular, Package Width=1.25mm, Power=125mW, Rated Temperature=70°C, Resistor Type="FIXED RESISTOR", Supplier Part Number=71-CRCW0805-20K-E3, Temperature Coefficient (ppm/Cel)=100, Tolerance=1%, Working Voltage=150V, Category="Chip SMD Resistors", ComponentLink1Description=https://datasheet.ciiva.com:443/pdfs/VipMasterIC/IC/VISH/VISH-S-A0007266705/VISH-S-A0007266705-1.pdf?src-supplier=IHS+Markit, ComponentLink1URL=https://datasheet.ciiva.com:443/pdfs/VipMasterIC/IC/VISH/VISH-S-A0007266705/VISH-S-A0007266705-1.pdf?src-supplier=IHS+Markit, ComponentLink2Description=https://datasheet.ciiva.com/11810/0900766b80d98b26-11810856.pdf?src-supplier=Rs, ComponentLink2URL=https://datasheet.ciiva.com/11810/0900766b80d98b26-11810856.pdf?src-supplier=Rs, ComponentLink3Description=https://datasheet.ciiva.com/7841/1720486-7841886.pdf?src-supplier=Element14, ComponentLink3URL=https://datasheet.ciiva.com/7841/1720486-7841886.pdf?src-supplier=Element14, ComponentLink4Description=https://datasheet.ciiva.com/8337/dcrcwe3-8337655.pdf?src-supplier=Avnet, ComponentLink4URL=https://datasheet.ciiva.com/8337/dcrcwe3-8337655.pdf?src-supplier=Avnet, ComponentLink5Description=https://datasheet.ciiva.com/16199/dcrcwe3-16199237.pdf?src-supplier=Future+Electronics, ComponentLink5URL=https://datasheet.ciiva.com/16199/dcrcwe3-16199237.pdf?src-supplier=Future+Electronics, ComponentLink6Description=https://datasheet.ciiva.com/26317/fld-crcw-e3-data-en-26317160.pdf?src-supplier=Distrelec, ComponentLink6URL=https://datasheet.ciiva.com/26317/fld-crcw-e3-data-en-26317160.pdf?src-supplier=Distrelec, ComponentLink7Description=https://datasheet.ciiva.com/2467/dcrcwe3-2467198.pdf?src-supplier=Digikey, ComponentLink7URL=https://datasheet.ciiva.com/2467/dcrcwe3-2467198.pdf?src-supplier=Digikey, ComponentLink8Description=https://datasheet.ciiva.com/2467/dcrcwe3-2467199.pdf?src-supplier=Digikey, ComponentLink8URL=https://datasheet.ciiva.com/2467/dcrcwe3-2467199.pdf?src-supplier=Digikey, ComponentLink9Description=https://datasheet.ciiva.com/2467/dcrcwe3-2467197.pdf?src-supplier=Digikey, ComponentLink9URL=https://datasheet.ciiva.com/2467/dcrcwe3-2467197.pdf?src-supplier=Digikey, ComponentLink10Description=https://datasheet.ciiva.com/16779/70201119-16779384.pdf?src-supplier=Allied+Electronics, ComponentLink10URL=https://datasheet.ciiva.com/16779/70201119-16779384.pdf?src-supplier=Allied+Electronics, ComponentLink11Description=https://datasheet.ciiva.com/5562/dcrcwe3-109170-5562293.pdf?src-supplier=Mouser, ComponentLink11URL=https://datasheet.ciiva.com/5562/dcrcwe3-109170-5562293.pdf?src-supplier=Mouser, Construction=Chip, JESD-609 Code=e3, Mounting Technology="Surface Mount", Packaging="Tape and Reel", Pins=2, Pricing="1=0.1, 10=0.025, 50=0.025, 100=0.021, 1000=0.013, 10000=0.007 (USD)", Reach SVHC Compliant=Yes, Reference Standard=AEC-Q200, RoHS=Yes, RoHS Compliant=Yes, Stock=127016, Supplier=Mouser, Technology="METAL GLAZE/THICK FILM", Terminal Finish=Nickel, Termination=Wraparound
S1: library part "Tactile switch", "6 x 6 mm, 6 mm Actuator Height, 260 gf, Black, Long Crimped, Through Hole, SPST, Tactile Switch", Package=None, Availability="In Stock", Check_prices=https://www.snapeda.com/parts/TS02-66-60-BK-260-LCR-D/CUI+Devices/view-part/?ref=eda, Component Type=Standard, CUI_purchase_URL=https://www.cuidevices.com/product/switches/tactile-switches/ts02-series?utm_source=snapeda.com&utm_medium=referral&utm_campaign=snapedaBOM, Design Item ID=TS02-66-60-BK-260-LCR-D, MF="CUI Devices", MP=TS02-66-60-BK-260-LCR-D, Pin Count=4, Price=None, Purchase-URL=https://pricing.snapeda.com/search/part/TS02-66-60-BK-260-LCR-D/?ref=eda, SnapEDA_Link=https://www.snapeda.com/parts/TS02-66-60-BK-260-LCR-D/CUI+Devices/view-part/?ref=snap, Source=TS02-66-60-BK-260-LCR-D.SchLib
TP1: library part Test_point_pad, "Test points for PCB"
U1 U5: library part CMP-0237-00215-3, "ARM Cortex-M3 32-bit MCU, 64 KB Flash, 20 KB Internal RAM, 37 I/Os, 48-pin LQFP, -40 to 85 degC, Tray", I/Os (High Current)=37, Operating Frequency(F) (Processor speed) (MHz)=72, Supply Voltage(Vcc) min (V)=2, A/D Converter="2x12-bit (10 Channel)", ComponentLink1Description="Manufacturer URL", ComponentLink1URL=http://www.st.com/web/en/home.html, ComponentLink2Description=Datasheet, ComponentLink2URL=http://www.st.com/st-web-ui/static/active/en/resource/technical/document/datasheet/CD00161566.pdf, ComponentLink3Description="Package Specification", ComponentLink3URL=http://www.st.com/st-web-ui/static/active/en/resource/technical/document/datasheet/DM00058181.pdf, Core="ARM Cortex-M3", DatasheetVersion="Rev. 16", FLASH Size (Prog) (kB)=64, Internal RAM Size (kB)=20, Mounting Technology="Surface Mount", PackageDescription="48-Pin Low Profile Quad Flat Package, 7 x 7 mm Body, 0.5 mm Pitch", PackageReference=LQFP48, PackageVersion="Rev. 6, 06/2013", Packing=Tray, PartNumber=STM32F103C8T6
U2 U3: library part CMP-0187-00133-3, "None", Case/Package=PDIP, Input Bias Current=1pA, Input Offset Voltage (Vos)=4.5mV, Max Operating Temperature=125°C, Max Supply Voltage=6V, Min Operating Temperature=-40°C, Min Supply Voltage=1.8V, Nominal Supply Current=100uA, Operating Supply Voltage=5.5V, Output Current=23mA, Package Quantity=60, Power Supply Rejection Ratio (PSRR)=86dB, Voltage Gain=112dB, Amplifier Type="GENERAL PURPOSE", Bandwidth=1MHz, Common Mode Rejection Ratio=60dB, Gain Bandwidth Product=1MHz, Height=3.3mm, Input Offset Voltage-Max=4.5mV, Lead Free="Lead Free", Length=9.27mm, Mount="Through Hole", Number of Amplifiers=2, Number of Channels=2, Number of Circuits=2, Number of Elements=2, Number of Pins=8, Operating Supply Current=100uA, Output Current per Channel=23mA, Packaging=Rail/Tube, Radiation Hardening=No, REACH SVHC="No SVHC", RoHS Compliant=Yes, Slew Rate=0.6V/µs, Slew Rate-Nom=0.6V/µs, Supply Current=100uA, Technology=CMOS, Unity Gain Bandwidth Product=1MHz, Width=6.35mm
U4: library part CMP-12756-000035-1, "IC REG LINEAR 3.3V 600MA SOT25", Case/Package=SOT-23-5, Dropout Voltage=250mV, Max Input Voltage=6V, Max Operating Temperature=85°C, Max Output Current=600mA, Min Input Voltage=2.5V, Min Operating Temperature=-40°C, Output Voltage=3.3V, Package Quantity=1, Quiescent Current=55uA, Accuracy=1.5%, Height=1.3mm, Lead Free="Lead Free", Length=3.1mm, Mount="Surface Mount", Number of Outputs=1, Number of Pins=5, Number of Regulators=1, Output Current=600mA, Output Type=Fixed, Packaging="Tape and Reel", Polarity=Positive, Width=1.7mm

## Nets (pads, with @x,y where several pads share a name; then routed paths per layer and width w, separated by ;. In a path a pad name is that pad's centre, name@x,y a point inside that pad or via, vN(x,y) a via of type N, cw(c..) or ccw(c..) an arc to the next point about the centre after c; other vN are vias at no path point)
3.3V: C5.2 C6.2 C7.2 C8.2 C9.2 C10.2 DS1.2 J2.1 J3.1 J3.6 TP1.1 U4.5 U5.1 U5.24 U5.36 U5.48
5V_USB: DS1.15 J1.1 R5.2 U4.1 U4.3
AMP_OUT1: C1.2 R1.1 U1.11 U2.1
AMP_OUT2: C2.2 R4.1 U1.12 U3.1
AMP_VCC: R2.1 R8.1 U1.10 U2.8 U3.8
BOOT0: R6.1 U1.44
BOOT1: R7.2
CTRST: C3.1 C4.1 C5.1 C6.1 C7.1 C8.1 C9.1 C10.1 C11.1 C12.1 D1.K D2.2 D3.2 DS1.1 DS1.3 DS1.16 J1.2 J2.5 J3.3 J3.4 R3.1 R9.1 S1.2 U2.4 U3.4 U4.2 U5.8 U5.23 U5.35 U5.47
D0: DS1.7 U1.18
D1: DS1.8 U1.19
D2: DS1.9 U1.20
D3: DS1.10 U1.39
D4: DS1.11 U1.40
D5: DS1.12 U1.41
D6: DS1.13 U1.42
D7: DS1.14 U1.43
EN: DS1.6 U1.21
NetC11_2: C11.2 U5.9
NetD1_A: D1.A R5.1
NetD2_1: D2.1 R1.2 U2.2
NetD3_1: D3.1 R4.2 U3.2
NetJ3_2: J3.2 R6.2
NetJ3_5: J3.5 R7.1
NetR2_2: R2.2 R3.2 U2.3
NetR8_2: R8.2 R9.2 U3.3
NRST: C12.2 S1.1 U1.7
RS: DS1.4 U1.45
RW: DS1.5 U1.46
SWCLK: J2.3 U1.37
SWDIO: J2.2 U1.34
UART_RX: J1.4 U1.30
UART_TX: J1.3 U1.31
pads on no net: C1.1 C2.1 C3.2 C4.2 DS1.MH1 DS1.MH2 DS1.MH3 DS1.MH4 J2.4 U1.1 U1.2 U1.3 U1.4 U1.5 U1.6 U1.8 U1.9 U1.13 U1.14 U1.15 U1.16 U1.17 U1.22 U1.23 U1.24 U1.25 U1.26 U1.27 U1.28 U1.29 U1.32 U1.33 U1.35 U1.36 U1.38 U1.47 U1.48 U2.5 U2.6 U2.7 U3.5 U3.6 U3.7 U4.4 U5.2 U5.3 U5.4 U5.5 U5.6 U5.7 U5.10 U5.11 U5.12 U5.13 U5.14 U5.15 U5.16 U5.17 U5.18 U5.19 U5.20 U5.21 U5.22 U5.25 U5.26 U5.27 U5.28 U5.29 U5.30 U5.31 U5.32 U5.33 U5.34 U5.37 U5.38 U5.39 U5.40 U5.41 U5.42 U5.43 U5.44 U5.45 U5.46

## Text inside footprints (layer, text, board x,y; h text height)
D1: Mechanical 13 "+" at 10809.56,4179.38 h39.37